# EAGLE board Glove-WiFi-M0-v0.3 (EAGLE 7.5.0)
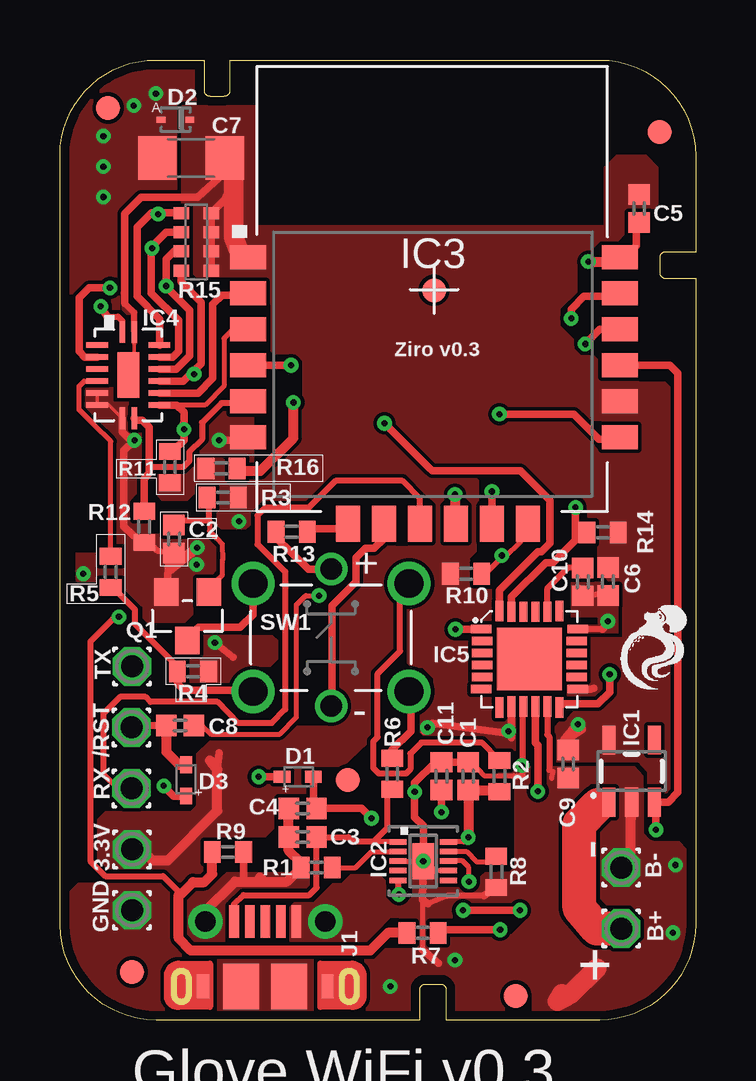
[diagram p0: board, top side]
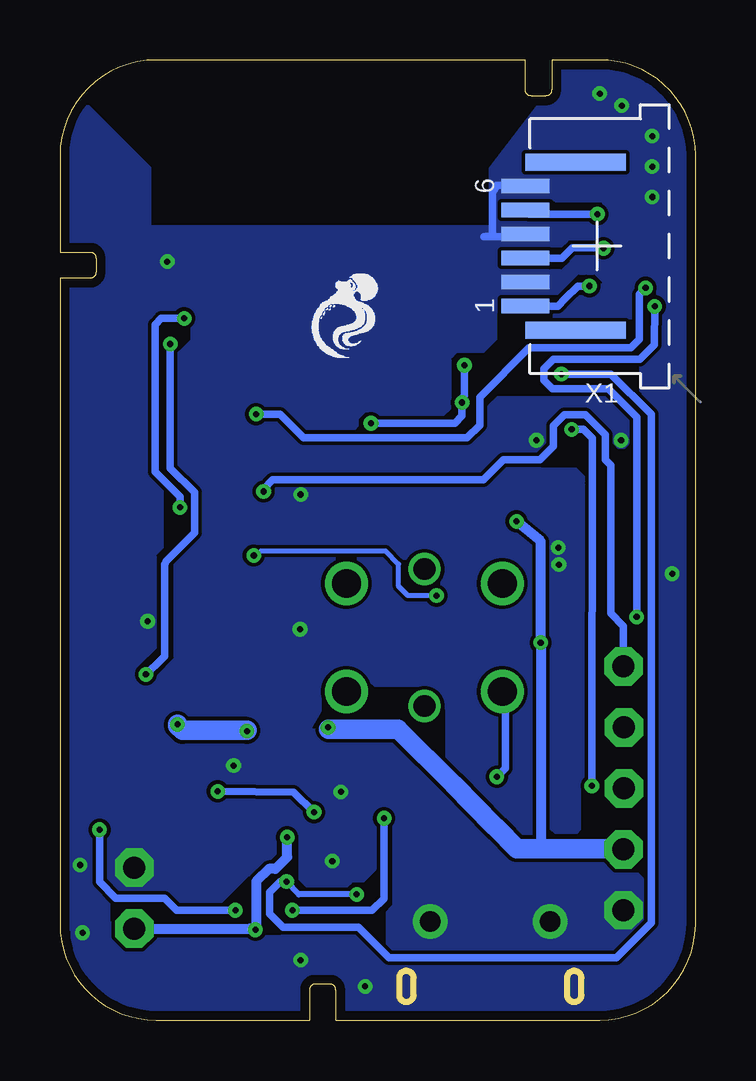
[diagram p1: board, bottom side, seen from below]

Size 26.5 x 40 mm. Coordinates in mm from the lower left corner, seen from the top.
Outline: 4,40 6,40 6,38.75 arc90 6.26,38.5 6.85,38.5 arc90 7.1,38.75 7.1,40 22.51,40 arc-90 26.5,36 26.5,32 25.26,32 arc90 25,31.75 25,31.15 arc90 25.26,30.9 26.5,30.9 26.5,4 arc-90 22.5,0 16.1,0 16.1,1.25 arc90 15.85,1.5 15.26,1.5 arc90 15,1.25 15,0 4,0 arc-89 0,3.96 0,36.04 arc-90 4,40
Copper layers (1*16): Top 0.0356mm / dielectric 1.5011mm / Bottom 0.0356mm
Design rules "oshpark-2layer *": minimum track width 6mil, minimum drill 10mil, track to track 6mil, track to pad 6mil, pad to pad 5mil, via to via 6mil, smd to smd 6mil, copper to edge 15mil, drill to drill 6mil, minimum pad ring 7mil, minimum via ring 7mil, stop-mask expansion 2.5mil, vias tented up to drill 0mil, thermal gap 10mil
tRestrict: area 16.6,15.8 to 17,16; area 8.3,33.1 to 8.7,38.3; area 7.1,38.1 to 8.6,38.6; area 21.2,16.5 to 22.4,16.8; 181 lines
bRestrict: 70 lines

## Footprints (pad centres in the part's own frame; a part is rotated, then mirrored left to right if it is on the bottom)
1,6/0,9 = drill 0.914 pad 1.6 octagon: 1 0,0
0402-CAP = smd 0.85 x 0.9: 1 -0.58,0; 2 0.58,0
1206 = smd 1.6 x 1.8: 1 -1.4,0; 2 1.4,0
SOD523 = smd 0.7 x 0.5: A 0.7,0; C -0.6,0
SOD-923 = smd 0.36 x 0.25: A -0.6,0; C 0.6,0
FIDUCIAL-1X2 = smd 1 x 1: 1 0,0
SOT23-5 = smd 0.55 x 1.2: 1 -0.95,-1.3; 2 0,-1.3; 3 0.95,-1.3; 4 0.95,1.3; 5 -0.95,1.3
BQ24040DSQR = smd 0.7 x 0.23: 1 -1.05,0.8; 2 -1.05,0.4; 3 -1.05,0; 4 -1.05,-0.4; 5 -1.05,-0.8; 6 1.05,-0.8; 7 1.05,-0.4; 8 1.05,0; 9 1.05,0.4; 10 1.05,0.8 | smd 0.914 x 1.499: 11 0,0 | drill 0.254 pad 0.508: V 0,0
WT8266 = smd 1.5 x 1: 1 -7.75,1.35; 2 -7.75,-0.15; 3 -7.75,-1.65; 4 -7.75,-3.15; 5 -7.75,-4.65; 6 -7.75,-6.15; 13 7.75,-6.15; 14 7.75,-4.65; 15 7.75,-3.15; 16 7.75,-1.65; 17 7.75,-0.15; 18 7.75,1.35 | smd 1 x 1.5: 7 -3.6,-9.75; 8 -2.1,-9.75; 9 -0.6,-9.75; 10 0.9,-9.75; 11 2.4,-9.75; 12 3.9,-9.75
DHVQFN16 = smd 0.24 x 0.9: 1 -0.25,1.8; 8 -0.25,-1.8; 9 0.25,-1.8; 16 0.25,1.8 | smd 0.9 x 0.24: 2 -1.3,1.25; 3 -1.3,0.75; 4 -1.3,0.25; 5 -1.3,-0.25; 6 -1.3,-0.75; 7 -1.3,-1.25; 10 1.3,-1.25; 11 1.3,-0.75; 12 1.3,-0.25; 13 1.3,0.25; 14 1.3,0.75; 15 1.3,1.25 | smd 0.9 x 1.9: EPAD 0,0
QFN.24.4X4 = smd 0.85 x 0.35: 1 -2.007,1.25; 2 -1.975,0.75; 3 -1.975,0.25; 4 -1.975,-0.25; 5 -1.975,-0.75; 6 -2.007,-1.25; 13 2.007,-1.25; 14 1.975,-0.75; 15 1.975,-0.25; 16 1.975,0.25; 17 1.975,0.75; 18 2.007,1.25 | smd 0.35 x 0.85: 7 -1.25,-2.007; 8 -0.75,-1.975; 9 -0.25,-1.975; 10 0.25,-1.975; 11 0.75,-1.975; 12 1.25,-2.007; 19 1.25,2.007; 20 0.75,1.975; 21 0.25,1.975; 22 -0.25,1.975; 23 -0.75,1.975; 24 -1.25,2.007 | smd 2.7 x 2.6: EPAD 0,0
USB-MICRO-MOLEX-105017-0001 = smd 0.4 x 1.35: 1 -1.3,1.3; 2 -0.65,1.3; 3 0,1.3; 4 0.65,1.3; 5 1.3,1.3 | drill 0.85 pad 1.45: G1 -2.5,1.3; G2 2.5,1.3 | smd 1.5 x 1.9: G3 1,-1.4; G4 -1,-1.4 | smd 0.5 x 1: G5 -2.6,-1.4; G6 2.6,-1.4
SOT-23 = smd 1.016 x 1.143: 1 -0.889,-1.016; 2 0.889,-1.016; 3 0,1.016
R0402 = smd 0.7 x 0.9: 1 -0.65,0; 2 0.65,0
0603-ARV = smd 0.5 x 0.65: 1 -1.2,-0.625; 2 -0.4,-0.625; 3 0.4,-0.625; 4 1.2,-0.625; 5 1.2,0.625; 6 0.4,0.625; 7 -0.4,0.625; 8 -1.2,0.625
TACTILE-LED-ON-MOM = drill 1.2: A-1 -3.25,2.25; A-2 3.25,2.25; B-1 -3.25,-2.25; B-2 3.25,-2.25 | drill 0.9: DA 0,2.85; DC 0,-2.85
CONN-6POS-FPC = smd 0.6 x 2: 1 -2.5,3; 2 -1.5,3; 3 -0.5,3; 4 0.5,3; 5 1.5,3; 6 2.5,3 | smd 0.7 x 4.2: NC-1 -3.5,0.9; NC-2 3.5,0.9

## Placement (x,y rotation side)
3.3V  WIREPAD1,6/0,9  [1,6/0,9]  3.01,7.11 0 top
/RST  WIREPAD1,6/0,9  [1,6/0,9]  2.98,12.19 0 top
B+  WIREPAD1,6/0,9  [1,6/0,9]  23.4,3.81 90 top
B-  WIREPAD1,6/0,9  [1,6/0,9]  23.4,6.35 90 top
C1  0.1uF  [0402-CAP]  17.03,10.16 90 top
C2  10uF  [0402-CAP]  4.76,20.04 270 top
C3  0.1uF  [0402-CAP]  10.12,7.62 180 top
C4  0.1uF  [0402-CAP]  10.12,8.81 180 top
C5  0.1uF  [0402-CAP]  24.15,33.81 270 top
C6  0.1uF  [0402-CAP]  22.85,18.27 270 top
C7  100u  [1206]  5.47,35.92 180 top
C8  0.1uF  [0402-CAP]  5.01,12.27 180 top
C9  0.1uF  [0402-CAP]  21.19,10.67 270 top
C10  0.1uF  [0402-CAP]  21.8,18.26 270 top
C11  0.1uF  [0402-CAP]  15.91,10.16 90 top
D1  PMEG3005EB  [SOD523]  9.96,10.13 180 top
D2  ESD9X5.0ST5G  [SOD-923]  4.82,37.52 0 top
D3  PMEG3005EB  [SOD523]  5.27,10.03 270 top
FD1  FIDUCIAL1X2  [FIDUCIAL-1X2]  12,10 0 top
FD2  FIDUCIAL1X2  [FIDUCIAL-1X2]  3,2 0 top
FD3  FIDUCIAL1X2  [FIDUCIAL-1X2]  19,1 0 top
FD4  FIDUCIAL1X2  [FIDUCIAL-1X2]  15.6,30.4 0 top
FD5  FIDUCIAL1X2  [FIDUCIAL-1X2]  2,38 0 top
FD6  FIDUCIAL1X2  [FIDUCIAL-1X2]  25,37 0 top
GND  WIREPAD1,6/0,9  [1,6/0,9]  3.01,4.57 0 top
IC1  AP2112K-3.3V  [SOT23-5]  23.84,10.37 0 top
IC2  BQ24040DSQR_BMS  [BQ24040DSQR]  15.15,6.62 0 top
IC3  WT8266  [WT8266]  15.6,30.43 0 top
IC4  74HC4051_DHVQFN16  [DHVQFN16]  2.85,26.87 0 top
IC5  MPU-6050  [QFN.24.4X4]  19.57,15.03 0 top
J1  Micro-USB  [USB-MICRO-MOLEX-105017-0001]  8.56,2.8 0 top
Q1  2N7002-NMOS  [SOT-23]  5.32,16.83 180 top
R1  3k  [R0402]  10.7,6.35 0 top
R2  300k  [R0402]  18.32,10.16 270 top
R3  300k  [R0402]  6.79,21.77 0 top
R4  300k  [R0402]  5.54,14.53 180 top
R5  3k  [R0402]  2.12,18.67 90 top
R6  300k  [R0402]  13.85,10.26 90 top
R7  30k  [R0402]  15.12,3.63 0 top
R8  10k  [R0402]  18.19,6.17 90 top
R9  3k  [R0402]  7,7 180 top
R10  3k  [R0402]  16.94,18.59 180 top
R11  3k  [R0402]  4.58,23.04 270 top
R12  3k  [R0402]  3.51,20.55 90 top
R13  330E  [R0402]  9.66,20.35 0 top
R14  3k  [R0402]  22.62,20.32 0 top
R15  300k  [0603-ARV]  5.69,32.42 270 top
R16  3k  [R0402]  6.74,22.99 180 top
RX  WIREPAD1,6/0,9  [1,6/0,9]  2.98,9.65 0 top
SW1  [TACTILE-LED-ON-MOM]  11.3,15.93 0 top
TX  WIREPAD1,6/0,9  [1,6/0,9]  3.01,14.73 0 top
U$1  [OCTO_LOGO]  22.98,13.59 0 top
U$2  [OCTO_LOGO]  16.4,27.4 0 bottom
X1  CONN-FPC-6POS  [CONN-6POS-FPC]  4.1,32.24 90 bottom

## Library data of the parts
3.3V /RST B+ B- GND RX TX = wirepad
C1-C6 C8-C11 = 1_ZeroUI; PROD_ID: CAP-12416
C7 R15 = SparkFun-Passives
D1 D3 = diode
D2 IC3-IC5 J1 SW1 U$1 U$2 X1 = 1_ZeroUI
FD1-FD6 = SparkFun-Aesthetics
IC1 = SparkFun-PowerIC; PROD_ID: VREG-12457
IC2 = 1_ZeroUI; 3D_LIBRARY_NAME: TI_AllParts_2012-12-25; COPYRIGHT: Copyright (C) 2015 Accelerated Designs. All rights reserved; DATASHEETURL: http://www.ti.com/lit/gpn/BQ24040; FAMILY_NAME: BATTERY CHARGE MANAGEMENT; GENERIC_PART_NUMBER: BQ24040; INDUSTRY_STD_PKG_TYPE: SON; MANUFACTURER: Texas Instruments; MANUFACTURER_PART_NUMBER: BQ24040DSQR; PACKAGE_DESIGNATOR: DSQ; PIN_COUNT: 10; VENDOR: Vendor
Q1 = 1_ZeroUI; MPN: 2N7002,215
R1-R14 R16 = rcl

## Nets
3.3V: 3.3V.1 C5.1 C6.1 C7.1 C9.1 D2.C IC1.5 IC3.1 IC3.14 IC4.16 IC4.EPAD IC5.8 IC5.13 R3.2 R4.1 R10.2 R11.2 R14.2 R15.5 R15.6 R15.7 R15.8 R16.2
5V: C3.1 IC2.1 J1.1 R6.1
/POWEROFF_SWINT: IC4.5 R5.2
/RST: /RST.1 C8.2 D3.C
CHG_ON: IC2.5 IC2.8 IC4.12 R15.4
GND: B-.1 C1.2 C2.2 C3.2 C4.2 C5.2 C6.2 C7.2 C9.2 C10.2 C11.2 D2.A GND.1 IC1.2 IC2.3 IC2.7 IC2.11 IC2.V IC3.6 IC3.10 IC3.18 IC4.6 IC4.7 IC4.8 IC5.1 IC5.9 IC5.11 IC5.18 J1.5 J1.G1 J1.G2 J1.G3 J1.G4 J1.G5 J1.G6 Q1.2 R1.1 R8.1 R9.1 R12.1 X1.2 X1.4 X1.6
I2C_N: IC3.4 IC5.24 R16.1
I2C_P: IC3.17 IC5.23 R14.1
LED-G-A: IC3.7 R13.2
LED-G-C: IC3.8 SW1.DC
MPU_INT: IC3.16 IC5.12
MUX_COM: IC3.13 IC4.3
MUX_S0: IC3.2 IC4.11
MUX_S2: IC3.5 IC4.9 R12.2
N$1: IC4.15 R15.1 X1.5
N$2: C11.1 IC5.10
N$3: C10.1 IC5.20
N$4: IC4.14 R15.2 X1.3
N$5: IC4.13 R15.3 X1.1
N$6: R13.1 SW1.DA
N$9: C2.1 Q1.1 R3.1
N$10: IC2.2 R1.2
N$11: Q1.3 R2.1 SW1.A-1 SW1.A-2
N$12: D1.A R4.2 R5.1 R6.2 SW1.B-1 SW1.B-2
N$13: IC2.9 R8.2
PROGL/MUX_S1: D3.A IC3.3 IC4.10 R11.1
PWR_EN: C4.1 D1.C IC1.3 IC3.15
RST: C8.1 IC3.12 R10.1
RXD: IC3.9 RX.1
TXD: IC3.11 TX.1
V_BATT: B+.1 C1.1 IC1.1 IC2.10 R2.2 R7.2
VBATT_SENSE: IC4.1 R7.1 R9.2

## Tracks (layer width: path | path; a pad name or v marks a point on that pad's centre or on a via)
3.3V  (via drill 0.25)
  Top 0.152: IC4.16 3.1,27.12 IC4.EPAD
  Top 0.254: IC4.16 3.1,29.47 2.7,29.86
  Top 0.305: 2.7,29.86 2.7,33.6 3.39,34.29 5.75,34.29 6.87,35.31 | R15.5 R15.6 R15.7 R15.8 6.87,34.18 7.25,35.1 6.87,35.31 | 6.87,35.31 C7.1 | IC5.13 22.12,13.78 22.26,13.82 | 6.56,10.44 6.64,11.12 | 15.2,12.04 15.53,12.37 18.5,11.96 v18.7,12.04 18.83,11.76 IC5.8 | 7.21,15.12 v6.46,15.72
  Top 0.406: 3.3V.1 3.42,7.08 3.84,6.66 4.5,6.66 6.56,8.71 6.56,10.44 6.26,10.82 6.34,10.69 | v21.6,12.32 21.09,11.71 21.73,12.12
  Top 0.813: 7.48,32.02 7.25,32.61 7.25,35.1
  Bottom 0.305: 6.46,7.19 6.54,7.14 | 15.3,12.12 v15.32,12.19
  Bottom 0.406: 6.46,7.19 v6.46,15.72 6.46,19.95 v7.47,20.78 | v18.7,12.04 18.7,12.06
  Bottom 0.813: 3.3V.1 2.88,7.13 2.75,7.14 6.54,7.14 7.45,7.14 8.31,8 8.42,8.1 10.07,9.8 12.4,12.12 15.3,12.12 | 18.7,12.06 21.39,12.06 21.6,12.27 v21.6,12.32
  pour Top (rank 2, no thermals): 29.75,-0.19 -0.73,-0.19 -0.73,30.48 5.12,30.48 5.12,38.05 6.18,38.05 6.18,44.3 5.11,44.3 5.12,48.26 29.75,48.26
5V
  Top 0.203: IC2.1 13.07,7.42
  Top 0.254: C3.1 12.02,7.62 12.23,7.42 13.07,7.42 13.65,8 13.65,9.65 R6.1 | J1.1 7.26,4.82 7.65,5.21 10.4,5.21 10.7,5.51 C3.1
  Top 0.305: C3.1
/POWEROFF_SWINT
  Top 0.203: R5.2 2.12,24.11 1.43,24.79 1.41,24.82 0.8,25.42 0.8,26.41 1.01,26.62 IC4.5
/RST
  Top 0.305: C8.2 2.97,12.27 /RST.1
  Top 0.406: C8.2 4.43,11.18 4.98,10.63 D3.C
CHG_ON  (via drill 0.25)
  Top 0.203: v17.05,5.77 17.05,6.36 16.78,6.63 IC2.8
  Top 0.254: IC2.5 14.1,5.29 v14.13,5.23
  Top 0.305: R15.4 5.06,30.76 5.88,29.9 5.88,27.35 5.13,26.62 | 5.13,26.62 IC4.12 | 5.13,26.62 5.46,26.93 v5.6,26.91
  Bottom 0.254: v14.13,5.23 16.54,5.23 v17.05,5.77
  Bottom 0.305: v17.05,5.77 17.31,5.77 17.76,5.32 17.76,4.43 17.19,3.86 14.05,3.86 12.78,2.59 3.31,2.59 1.84,4.06 1.84,25.23 3.52,26.91 v5.6,26.91
GND  (via drill 0.25)
  Top 0.152: IC4.8 2.05,25.62 IC4.7 IC4.6
  Top 0.203: 14.1,6.6 IC2.3 IC2.V | IC2.7 15.56,6.22 | 15.12,5 15.12,2.93 | 17.16,10.74 17.69,10.19 18.91,10.19 19.04,10.15 | 16.15,5.18 15.35,4.85 | 20.4,10.41 20.56,10.36 20.5,10.09 20.51,10.06
  Top 0.254: 16.01,10.75 C11.2 | 22.62,16.28 IC5.18 | 21.58,18.07 C10.2 22.84,17.8 C6.2 | 17.67,5.17 16.15,5.18 | IC5.9 19.31,13.12 19.31,10.13 19.04,10.15 | IC5.11 20.32,11.89 20.4,11.81 20.4,10.41 | 3.71,19.91 4.06,19.56 C2.2
  Top 0.305: 11.06,1.4 J1.G6 | 15.56,6.22 IC2.V | IC2.V 15.12,5 15.35,4.85 | 15.12,2.93 15.78,2.36 | C5.2 24.04,33.18 24.04,32.26 23.55,31.77 23.53,31.77 23.37,31.8 IC3.18 | 16.01,10.75 C1.2 17.16,10.74 | 16.68,20.65 IC3.10 | IC2.V 15.15,8.1 14.79,8.46 14.79,9.88 15.63,10.72 15.89,10.72 C11.2 | v6.64,24.16 7.73,24.16 IC3.6 | R8.1 17.67,5.17 | IC4.8 2.6,24.51 2.95,24.16 v3.11,24.16 2.67,23.71 2.67,20.58 3.08,20.17 3.71,19.91 R12.1 | 22.62,16.28 22.84,16.51 22.87,16.54 22.87,16.66 22.82,16.71 | Q1.2 4.58,19.41 C2.2 | IC5.1 17.44,16.28 v16.49,16.28 16.47,16.28 | R9.1 7.65,5.77
  Top 0.406: J1.G1 6.06,4.53 7.3,5.77 7.65,5.77 8.52,5.77 | 8.52,5.77 9.47,5.77 R1.1 10.03,6.57 9.53,7.06 C3.2 C4.2 | v16.47,21.89 16.47,20.73 16.49,20.7 16.49,20.65 | v22.03,31.6 23.33,31.6 23.35,31.62 | v5.72,19.68 4.63,18.8 | 4.71,19.61 4.68,19.58 4.7,19.56 C2.2 | B-.1 23.4,6.6 23.81,6.81 23.81,8.39 IC1.2 | 8.34,5.94 8.52,5.77
  Top 0.813: 22.38,2.16 21.28,1.06 20.73,0.79 20.92,1.09
  Bottom 0.305: X1.4 7.21,32.64 8.47,32.64 | 8.47,32.64 8.82,32.64 | X1.6 7.13,34.77 8.28,34.77 8.47,34.46 8.47,32.64 | 8.47,32.64 8.42,32.66 8.72,32.66
  other vias: 1.81,36.83 1.81,35.56 1.81,34.29 4,38.6 3.08,38.1 22.84,16.62 13.77,1.4 16.47,2.49 14.79,9.5 19.26,10.6 25.66,6.46 25.56,3.64 5.7,18.97 0.97,18.59
  pour Bottom (isolate 0.025, rank 2, no thermals): 25.94,-2.54 25.94,3.81 28.48,3.81 28.48,41.91 -3.27,41.91 -3.27,-2.54
  pour Top (isolate 0.025, rank 3, no thermals): 8,41.25 -1.69,41.25 -1.69,33.99 -1.72,33.99 -1.72,22.92 8,22.92
  pour Top (no thermals): 21.19,18.67 22.07,18.67 23.22,17.52 23.22,16.1 21.17,16.08
  pour Top (no thermals): -1.95,6.07 18.37,6.07 18.37,10.49 27.24,10.49 27.21,-1.27 -2,-1.27
  pour Top (no thermals): 0.87,26.54 2.04,26.54 2.04,25.65 3.56,24.27 3.56,20.17 7.27,20.17 7.27,16.56 3.03,16.56 3.03,17.25 1.97,18.31 0.77,18.31 0.77,26.47
I2C_N  (via drill 0.25)
  Top 0.305: IC3.4 v9.63,27.28 | IC5.24 18.32,17.91 19.92,19.51 20.06,19.51 20.43,19.87 20.43,21.65 19.19,22.89 15.53,22.89 15.4,23 v13.53,24.87
  Top 0.406: R16.1 7.48,22.89 8.36,22.89 9.74,24.24 v9.74,25.73
  Bottom 0.305: v9.63,27.28 9.63,26.01 9.74,25.91 v9.74,25.73 9.74,25.17 10.04,24.87 v13.53,24.87
I2C_P  (via drill 0.25)
  Top 0.152: IC3.17 23.35,30.25 23.25,30.15
  Top 0.305: 21.5,20.7 21.5,19.98 20.56,19.05 20.25,19.05 18.83,17.63 18.83,16.84 IC5.23 | 23.25,30.15 21.85,30.15 21.32,29.62 v21.32,29.23 | v21.5,21.36 21.5,20.78 21.5,20.7 | 21.5,20.7 21.5,20.3 21.8,20.3 R14.1
  Bottom 0.305: v21.32,29.23 22.28,29.23 22.54,28.98 22.54,22.84 21.5,21.79 v21.5,21.36
LED-G-A
  Top 0.305: R13.2 10.39,20.46 11.77,20.47 11.95,20.6
  Top 0.813: 11.95,20.6 11.95,20.63 IC3.7
LED-G-C
  Top 0.305: IC3.8 13.5,20.11 13.5,20.05 13.09,19.66 12.73,19.66 12.34,19.27 12.34,18.27 11.34,17.26 11.34,12.97 SW1.DC
MPU_INT  (via drill 0.25)
  Top 0.305: IC3.16 22.51,28.78 v21.9,28.17 | v22.92,14.4 22.92,13.67 22.42,13.17 20.85,13.17 20.85,12.85 IC5.12
  Bottom 0.305: v21.9,28.17 21.9,22.99 20.89,21.99 20.89,20.3 22.08,19.11 22.12,19.01 22.13,19 22.13,15.17 22.48,14.81 v22.92,14.4
MUX_COM  (via drill 0.25)
  Top 0.152: IC3.13 23.04,24.28 22.96,24.2
  Top 0.305: IC4.3 1.03,27.62 0.8,27.86 0.8,30.09 1.22,30.51 v2.09,30.5 | v18.32,25.25 21.42,25.25 22.47,24.2 22.96,24.2
  Bottom 0.305: v2.09,30.5 2.35,30.24 2.35,28.36 2.69,28.02 6.94,28.02 9,25.96 9,24.79 9.53,24.26 16.34,24.26 17.33,25.25 v18.32,25.25
MUX_S0
  Top 0.152: 7.32,30.23 7.32,30.2
  Top 0.203: 7.32,30.23 7.37,30.28 IC3.2
  Top 0.305: IC4.11 5.75,26.12 6.37,26.74 6.37,29.82 6.76,30.2 7.32,30.2
MUX_S2
  Top 0.152: 7.8,25.7 7.8,25.72 IC3.5
  Top 0.254: 7.8,25.7 6.74,25.7 5.93,24.89 5.93,24.19 5.39,23.67 5.39,23.29 5.14,23.04 3.73,23.04
  Top 0.305: IC4.9 3.18,24.99 3.42,24.99 3.73,24.69 3.73,23.04 3.72,22.88 3.72,22.78 3.51,22.55 R12.2
N$1  (via drill 0.25)
  Top 0.305: IC4.15 4.15,29.21 3.21,30.15 3.21,33.03 3.78,33.59 | 3.78,33.59 3.82,33.63 4.8,33.63 R15.1 | v4.09,33.58 3.78,33.59
  Bottom 0.305: X1.5 6.94,33.58 v4.09,33.58
N$2  (via drill 0.25)
  Top 0.305: C11.1 v15.91,8.66 | v19.92,9.53 19.92,11.46 19.82,11.56 19.82,11.92 IC5.10
  Bottom 0.305: v15.91,8.66 16.76,9.5 v19.92,9.53
N$3
  Top 0.254: 21.74,19 C10.1 21.18,18.84 20.3,17.96 20.3,17.03 IC5.20
N$4  (via drill 0.25)
  Top 0.305: R15.2 4.43,32.82 3.76,32.15 3.86,32.13 3.91,32.13 v3.84,32.16 3.84,32.12 3.79,32.11 3.79,30.29 4.94,29.16 4.94,27.87 4.69,27.62 IC4.14
  Bottom 0.305: X1.3 5.58,31.74 5.14,32.18 3.86,32.18 v3.84,32.16
N$5  (via drill 0.25)
  Top 0.305: R15.3 4.8,32.03 4.76,32.03 4.43,31.69 v4.43,30.58 4.38,30.53 4.45,30.53 5.42,29.57 5.42,27.69 4.85,27.12 IC4.13
  Bottom 0.305: X1.1 5.75,29.74 5.42,30.07 4.91,30.58 v4.43,30.58
N$6
  Top 0.305: SW1.DA 10.36,18.78 9,20.12 R13.1
N$9
  Top 0.203: 6.15,18.03 6.11,18.25 6.52,18.3 6.77,18.55 6.77,19.16 6.77,19.83 6.54,20.07 6.23,20.37 6.23,20.82 6.22,20.83
  Top 0.254: 6.36,17.93 6.33,18.14 6.15,18.03 | R3.1 6.13,21.64 6.22,21.53 6.22,20.83 4.86,20.83 C2.1
  Top 0.305: Q1.1 6.36,17.93
N$10
  Top 0.203: R1.2 12.33,6.35 12.99,7.01 IC2.2
N$11
  Top 0.254: 18.27,10.87 17.58,11.56 15.07,11.56 14.61,11.1 14.61,10.45 14.43,10.26 13.3,10.26 13.06,10.5 13.06,11.61 13.24,11.79 13.24,14.43 14.18,15.37 14.18,17.66 SW1.A-2
  Top 0.305: SW1.A-1 8.06,16.89 7.5,16.36 5.79,16.36 5.52,16.08 Q1.3 | R2.1 18.27,10.87
N$12  (via drill 0.25)
  Top 0.254: R5.1 2.34,17.89 3.12,17.11 3.12,16.51 4.92,14.71 R4.2
  Top 0.305: v8.29,10.13 D1.A | R6.2 13.85,11.25 14.64,12.04 14.64,13.72 SW1.B-2 | R4.2 4.9,14.02 5.18,13.74 7.86,13.74 SW1.B-1
  Bottom 0.305: v8.29,10.13 7.94,10.49 7.94,13.72 SW1.B-1
N$13
  Top 0.203: IC2.9 16.94,7.02 17.36,6.6 17.92,6.6 18.09,6.78 18.32,7.02
  Top 0.305: 18.32,7.02 R8.2
PROGL/MUX_S1  (via drill 0.25)
  Top 0.203: 4.87,25.62 6.04,25.62 6.84,26.42 6.84,28.4 7.2,28.75 7.76,28.75 7.81,28.7
  Top 0.305: 5.17,24.84 5.17,25.32 4.87,25.62 IC4.10 | 7.81,28.7 7.81,28.73 IC3.3 | R11.1 4.99,23.98 5.17,24.16 5.17,24.59 | 5.17,24.59 5.17,24.84 | D3.A 4.75,9.33 v4.33,9.75 | 5.17,24.84 v5.17,24.61 | v5.17,24.61 5.17,24.59 | v5.17,24.61 5.14,24.81 5.17,24.84
  Bottom 0.305: v4.33,9.75 4.3,24.23 4.68,24.61 v5.17,24.61
PWR_EN  (via drill 0.25)
  Top 0.305: IC3.15 25.43,27.28 25.76,26.95 25.76,9.48 25.36,9.07 25.31,9.07 | v12.99,8.41 12.58,8.81 C4.1 10.56,9.09 D1.C 10.62,10.13 10.68,10.16 | 25.31,9.07 IC1.3 24.85,9.01 v24.85,7.92 | v16.81,4.57 v19.19,4.57 | 25.31,9.07
  Bottom 0.305: v12.99,8.41 12.99,5.05 13.5,4.57 v16.81,4.57 | v19.19,4.57 21.65,4.57 22.13,5.08 24.18,5.08 24.85,5.75 v24.85,7.92
RST  (via drill 0.25)
  Top 0.152: IC3.12 19.5,20.59 19.24,20.32
  Top 0.203: C8.1 5.93,12.27 6.3,11.91 9.17,11.91 9.86,12.61 9.86,17.3 10.24,17.68 v10.8,17.68 | R10.1 17.46,18.72 17.86,18.72 18.27,19.12 v18.42,19.36 18.52,19.28 19.21,19.94 19.21,20.18 19.24,20.23
  Top 0.305: 19.24,20.23 19.24,20.32 19.24,20.38 | 19.54,20.72 IC3.12
  Bottom 0.203: v10.8,17.68 12,17.68 12.38,18.07 12.38,19 12.91,19.53 18.12,19.53 v18.42,19.36
RXD
  Top 0.254: IC3.9 15,21.73 14.27,22.46 11.49,22.46 10.37,21.34 8.54,21.34 8.23,21.03 8.23,19.82 9.4,18.68 9.4,12.94 8.83,12.37 7.43,12.37 6.57,13.26 3.77,13.26 3.56,13.46 2.51,13.46 1.81,12.77 1.81,10.23 2.4,9.65 RX.1
TXD  (via drill 0.25)
  Top 0.305: IC3.11 18,21.6 v18.01,22.02
  Bottom 0.305: TX.1 3.01,16.41 3.54,16.94 3.54,23.11 3.77,23.34 3.77,24.39 4.6,25.22 5.47,25.22 5.93,24.76 5.93,23.9 6.49,23.34 8.02,23.34 8.85,22.51 17.63,22.51 18.01,22.12 v18.01,22.02
V_BATT  (via drill 0.25)
  Top 0.152: 22.44,8.97 IC1.1
  Top 0.203: v17.03,7.62 16.83,7.42 IC2.10
  Top 0.305: R7.2 15.9,3.73 15.92,3.61 15.78,3.61 15.93,3.76 v18.35,3.76 | 18.25,9.58 R2.2
  Top 0.406: 18.25,9.58 C1.1 v17.03,7.62
  Top 1.422: B+.1 22.39,3.81 21.67,4.66 21.67,8.19 22.44,8.97
  Bottom 0.406: v17.03,7.62 17.03,6.79 17.51,6.3 17.79,6.3 18.32,5.77 18.32,3.82 v18.35,3.76 18.58,3.81 B+.1
VBATT_SENSE  (via drill 0.25)
  Top 0.254: 2.3,16.8 1.26,15.76 1.26,6.62 1.89,5.99 4.3,5.99 5.05,5.25 | 1.98,29.31 2.42,29.31 2.6,29.13 IC4.1
  Top 0.305: 2.3,16.8 v2.46,16.8 | v1.7,29.73 1.98,29.31
  Top 0.406: R7.1 13.67,3.63 12.94,2.9 5.46,2.9 4.95,3.4 4.95,5.22 5.05,5.25 5.55,5.74 6.01,5.74 6.35,6.08 R9.2
  Bottom 0.305: v2.46,16.8 2.46,25.12 3.65,26.3 5.97,26.3 6.33,26.66 6.33,27 6.33,27.14 5.93,27.53 2.33,27.53 1.73,28.13 v1.7,29.73

## Text on the board
tPlace: Ziro v0.3 | - | + | Glove WiFi v0.3
tCream: tCream
Reference: 1 | 6 | Front | GLOVE